# Altium PCB PCB_top.PcbDoc
Units mm, origin at the board's own origin, x right, y up, seen from the top; angles counter-clockwise.
Board outline 9.8 x 15.95 mm, 2 copper layers (Top Layer, Bottom Layer), stack 2.071 mm thick; 2 components, 3 nets, 7 pads, 1 vias.
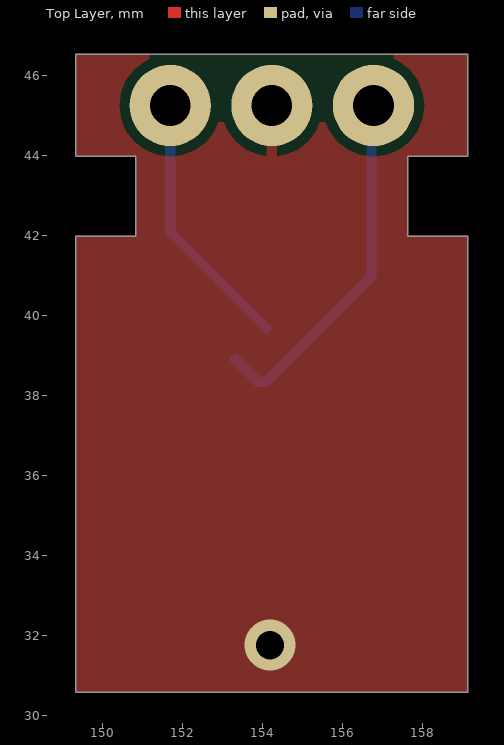
[diagram p0: Top Layer view]
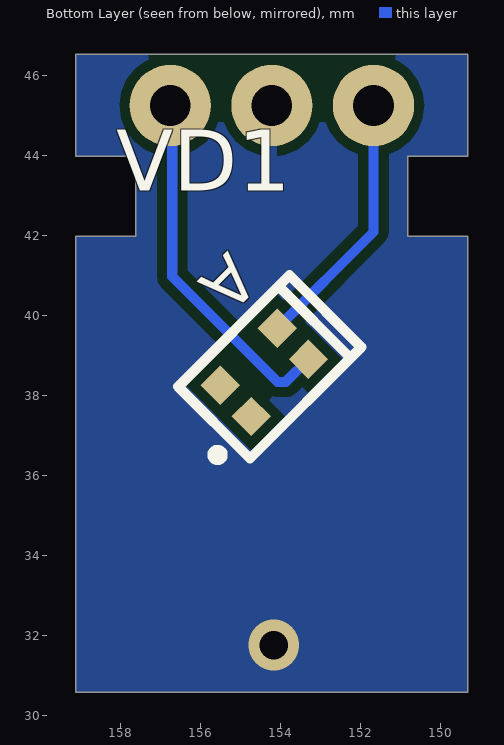
[diagram p1: Bottom Layer view, seen from below]

## Layer stack, top to bottom
Top Solder: solder mask 0.0102, Solder Resist, Dk 3.5
Top Layer: signal copper 0.0356
Dielectric 1: dielectric 2, FR-4, Dk 4.8
Bottom Layer: signal copper 0.0356
Bottom Solder: solder mask 0.0102, Solder Resist, Dk 3.5

## Board outline
149.325,30.571 149.325,41.971 150.825,41.971 150.825,43.971 149.325,43.971 149.325,46.518 159.125,46.518 159.125,43.971 157.625,43.971 157.625,41.971 159.125,41.971 159.125,30.571

## Design rules (kind name [scope] priority, off if disabled: settings)
Clearance [All] p1: gap=0.254 ignorepadtopadclearanceinfootprint=FALSE except(0: Arc-Hole Track-Hole SMDPad-Hole THPad-Hole Via-Hole Fill-Hole Poly-Hole Region-Hole Text-Hole)
PolygonConnect [All] p1: thpad.connectstyle=Relief thpad.reliefconductorwidth=0.254 thpad.reliefentries=4 thpad.polygonreliefangle="90 Angle" thpad.airgapwidth=0.254 smdpad.connectstyle=Relief smdpad.reliefconductorwidth=0.254 smdpad.reliefentries=4 smdpad.polygonreliefangle="90 Angle" smdpad.airgapwidth=0.254 via.connectstyle=Direct via.reliefconductorwidth=0.254 via.reliefentries=4 via.polygonreliefangle="90 Angle" via.airgapwidth=0.254
RoutingVias [All] p1: holewidth=0.711 width=1.27 viastyle="Through Hole" minholewidth=0.711 minwidth=1.27 maxholewidth=0.711 maxwidth=1.27
SolderMaskExpansion [All] p1: expansion=0.102
Width [All] p1: maxlimit=0.254 minlimit=0.254 preferedwidth=0.254
30 further rules are at their usual default settings.

## Components (designator, comment, footprint, x,y, rotation, side; value= is the part's Value field where it differs from the comment)
VD1 "S14160-1310PS Hamamatsu" S14160-1310PS 154.415,38.571 r315 bottom
XP1 "3pin_header_SCSL" "3pin_header - SCSL" 151.685,45.241 r0 bottom

## Footprints (in the part's own frame and the unit in brackets; to place one, negate y for a bottom-side part, rotate by r counter-clockwise, add the part's x,y. Pads: shape width x height; smd on the part's side, far side on the other; paste and mask are expansions set on the pad)
"3pin_header - SCSL" [mil]
  round 80 hole 40: 0(0,0) 1(100,0) 2(200,0)
  body extent -50,-50 250,50, height 358
S14160-1310PS [mm]
  rect 0.7x0.7 smd: 1(1.012,0.55) 2(-1.012,0.55) 3(-1.013,-0.55) 4(1.012,-0.55)
  silkscreen extent -2.16,-1.27 2.41,1.27, body extent -1.31,-1.05 1.32,1.05, height 0.85

## Part data
VD1: library part S14160-1310PS, Manufacturer=Hamamatsu, Name=S14160-1310PS

## Via types
v1: diameter 1.27, hole 0.711, Top Layer to Bottom Layer, tented both sides, 1 vias

## Nets (pads, with @x,y where several pads share a name; then routed paths per layer and width w, separated by ;. In a path a pad name is that pad's centre, name@x,y a point inside that pad or via, vN(x,y) a via of type N, cw(c..) or ccw(c..) an arc to the next point about the centre after c; other vN are vias at no path point)
GND: XP1.1
  other v1: 154.178,31.75
NetVD1_2: VD1.2 XP1.2 | length 8.9
  Bottom Layer w0.254: VD1.2 153.876,38.332 154.086,38.332 156.718,40.964 XP1.2@156.718,45.085
NetVD1_3: VD1.3 XP1.0 | length 6.6
  Bottom Layer w0.254: XP1.0 151.685,42.079 VD1.3
pads on no net: VD1.1 VD1.4

## Polygon pours and split planes (outlines as drawn)
GND on Bottom Layer "GND_L02_P000" (solid, remove dead copper, pour order 0): 149.325,46.518 159.125,46.518 159.125,43.971 157.625,43.971 157.625,41.971 159.125,41.971 159.125,30.571 149.325,30.571 149.325,41.971 150.825,41.971 150.825,43.971 149.325,43.971
GND on Top Layer "GND_L01_P002" (solid, remove dead copper, pour order 2): 149.325,46.531 159.125,46.531 159.125,43.985 157.625,43.985 157.625,41.985 159.125,41.985 159.125,30.585 159.125,30.584 159.125,30.585 149.325,30.585 149.325,41.985 150.825,41.985 150.825,43.985 149.325,43.985

## Silkscreen, mask and mechanical layers (free items; w line width, h text height)
Mechanical 1:
  lines w0.1: 149.325,46.518 159.125,46.518 159.125,43.971 157.625,43.971 157.625,41.971 159.125,41.971 159.125,30.571 149.325,30.571 149.325,41.971 150.825,41.971 150.825,43.971 149.325,43.971 149.325,46.531

## Text inside footprints (layer, text, board x,y; h text height)
VD1: Bottom Overlay "A" at 155.313,41.624 h1.2 r135